# Altium PCB BreakOut_2017.PcbDoc
Units mm, origin at the board's own origin, x right, y up, seen from the top; angles counter-clockwise.
Board outline 34 x 35 mm, 4 copper layers (Component Side, Ground Plane, Power Plane, Solder Side), stack 0.844 mm thick; 34 components, 124 nets, 335 pads, 166 vias.
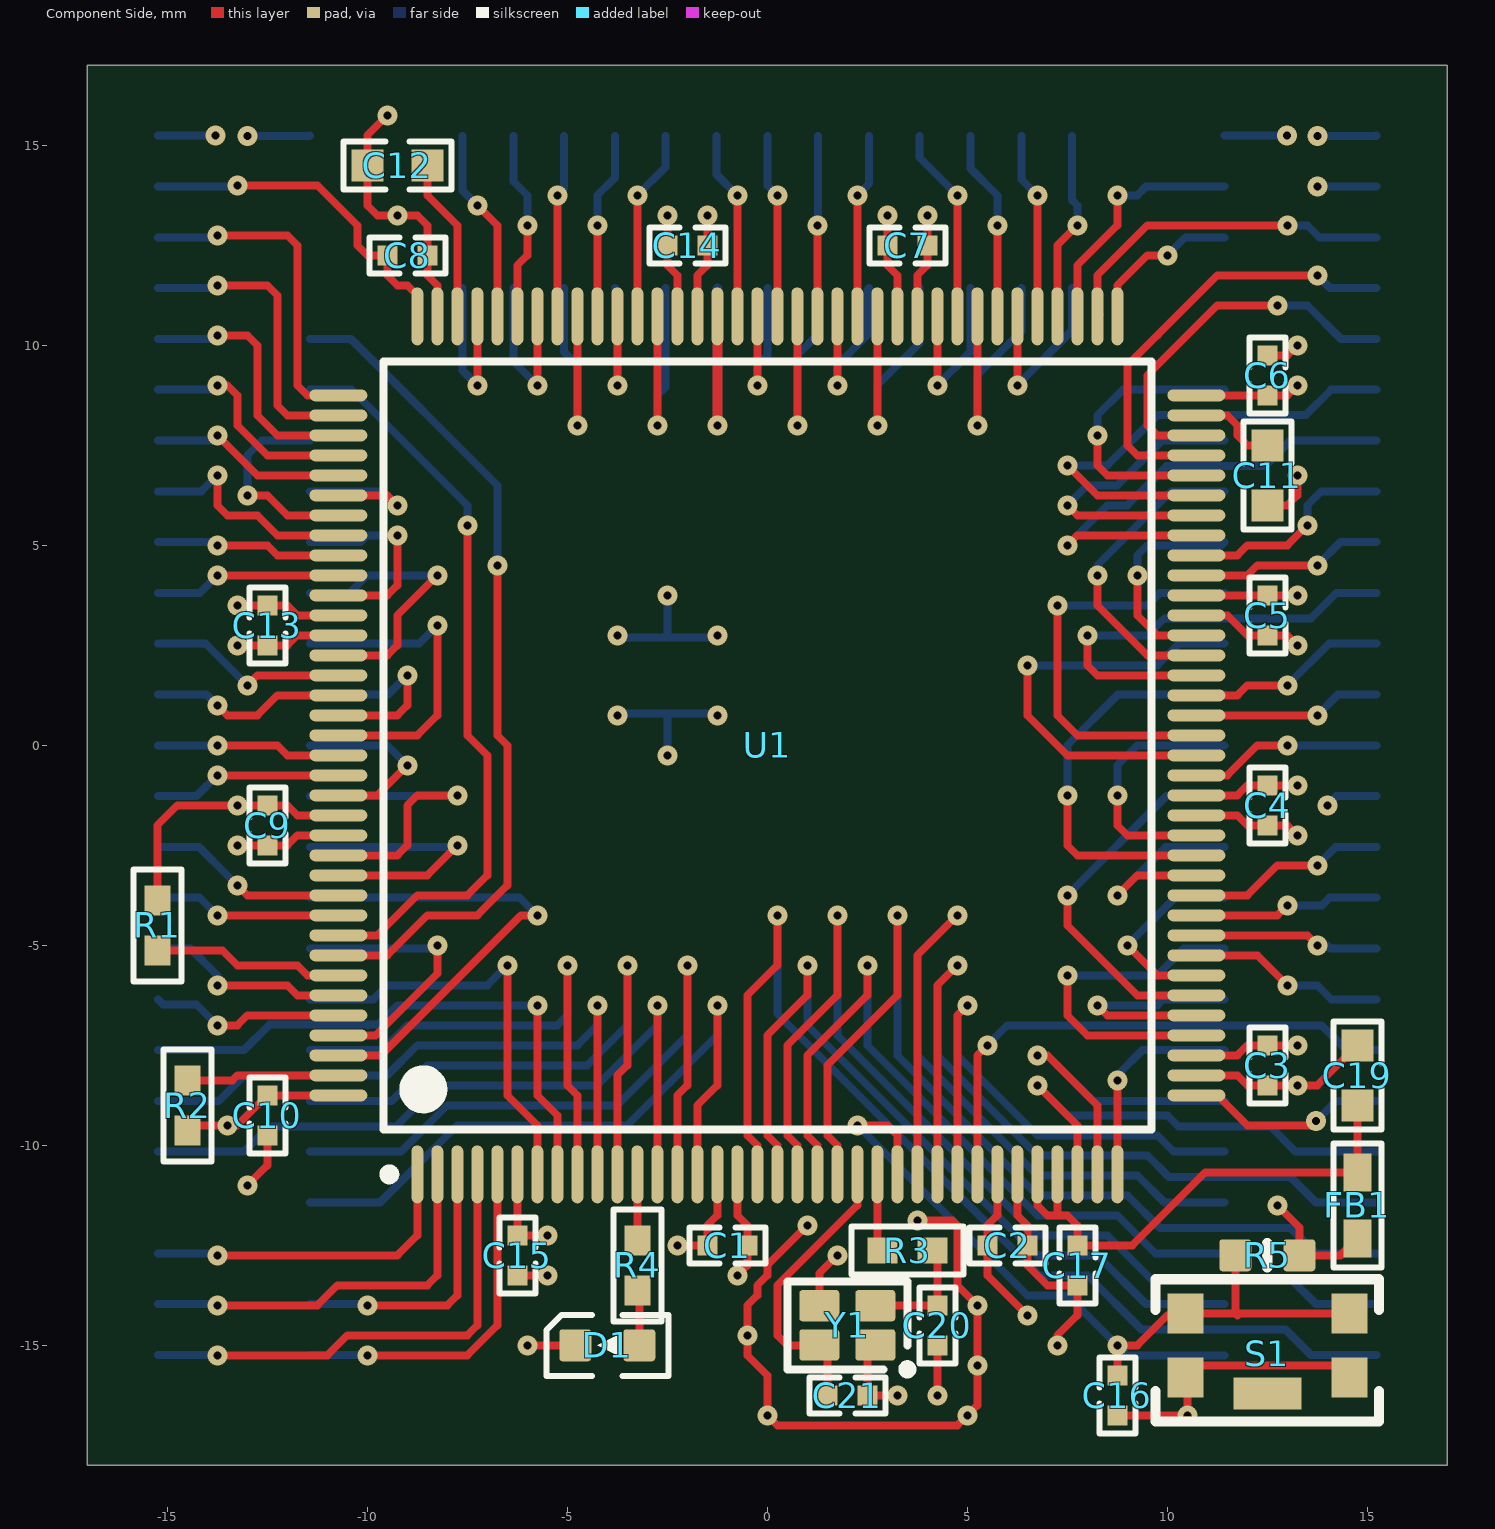
[diagram p0: Component Side view]
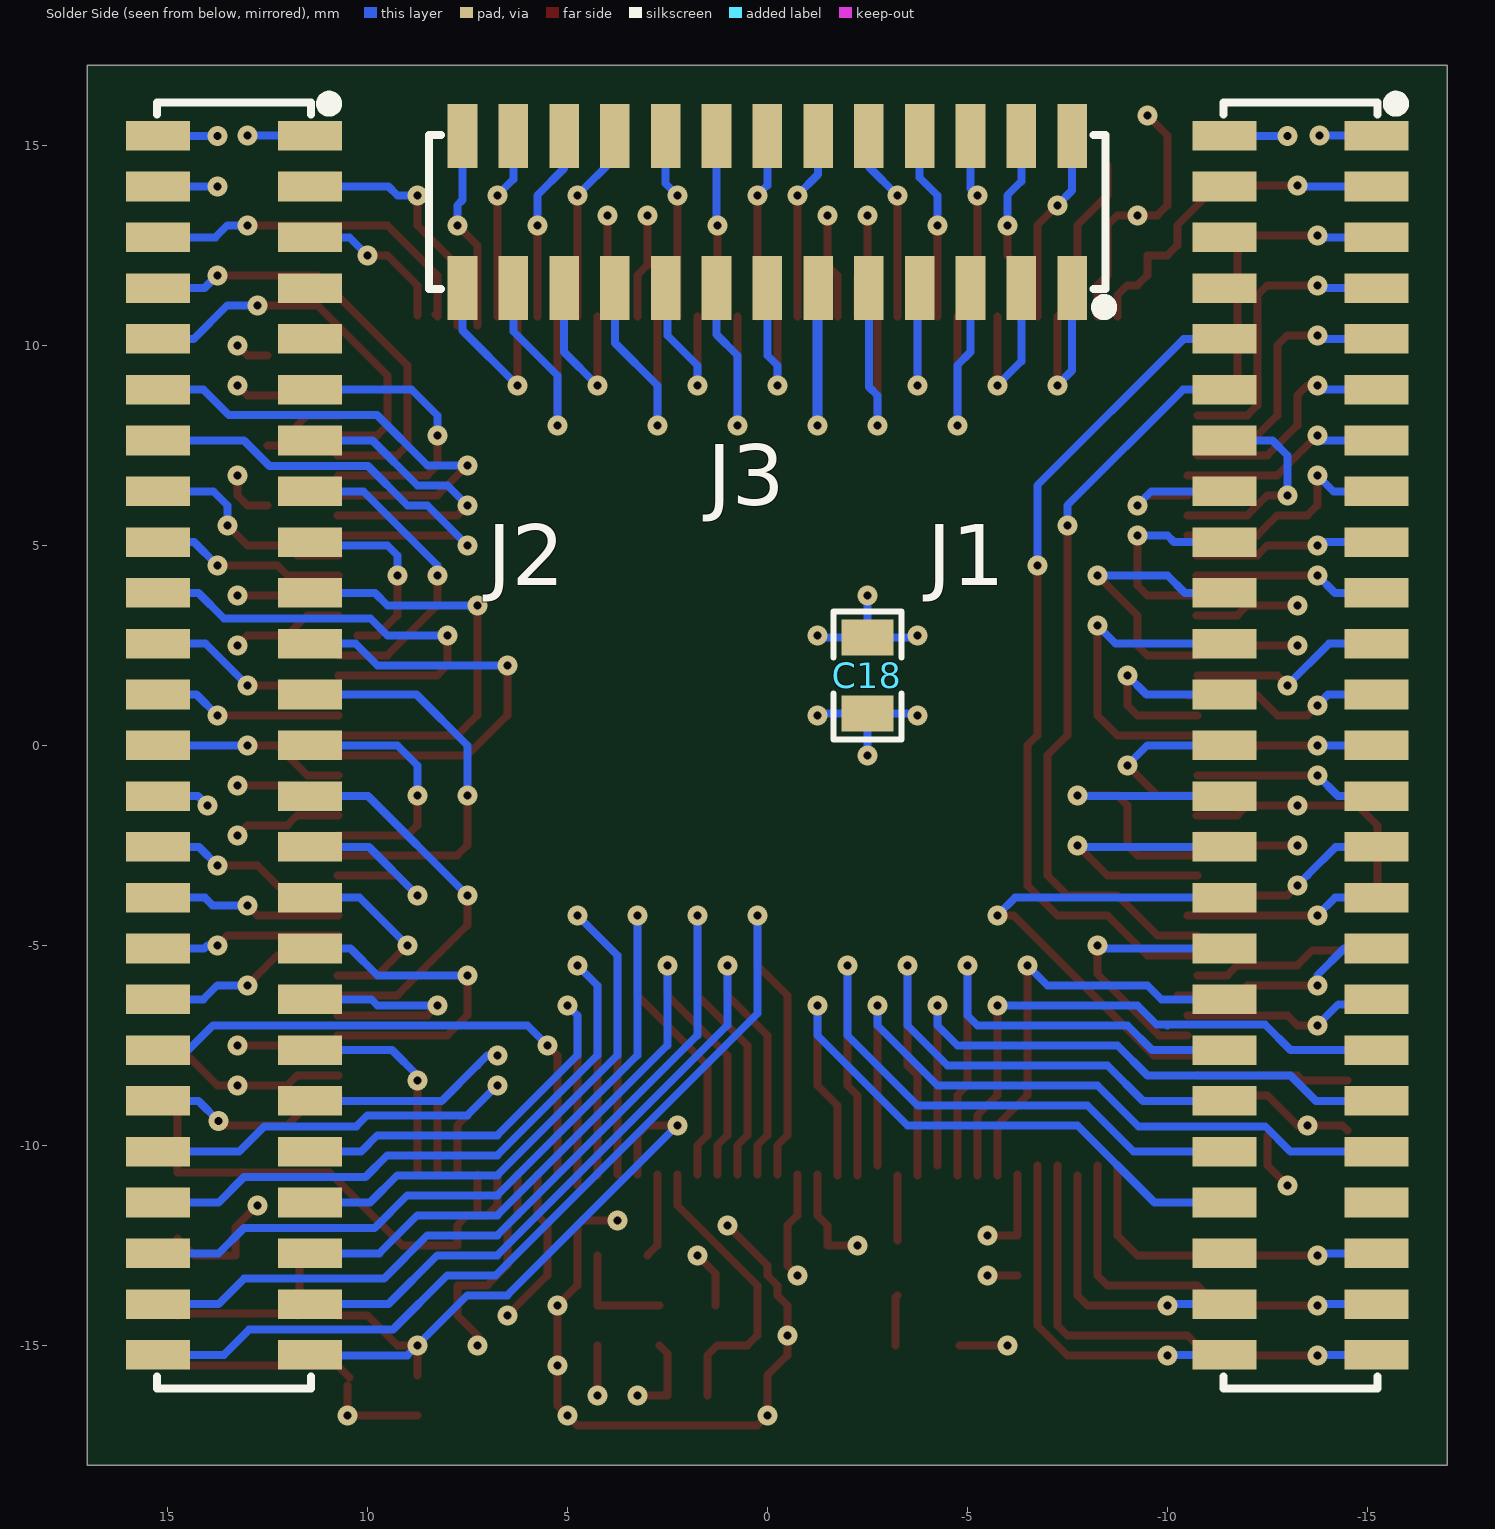
[diagram p1: Solder Side view, seen from below]
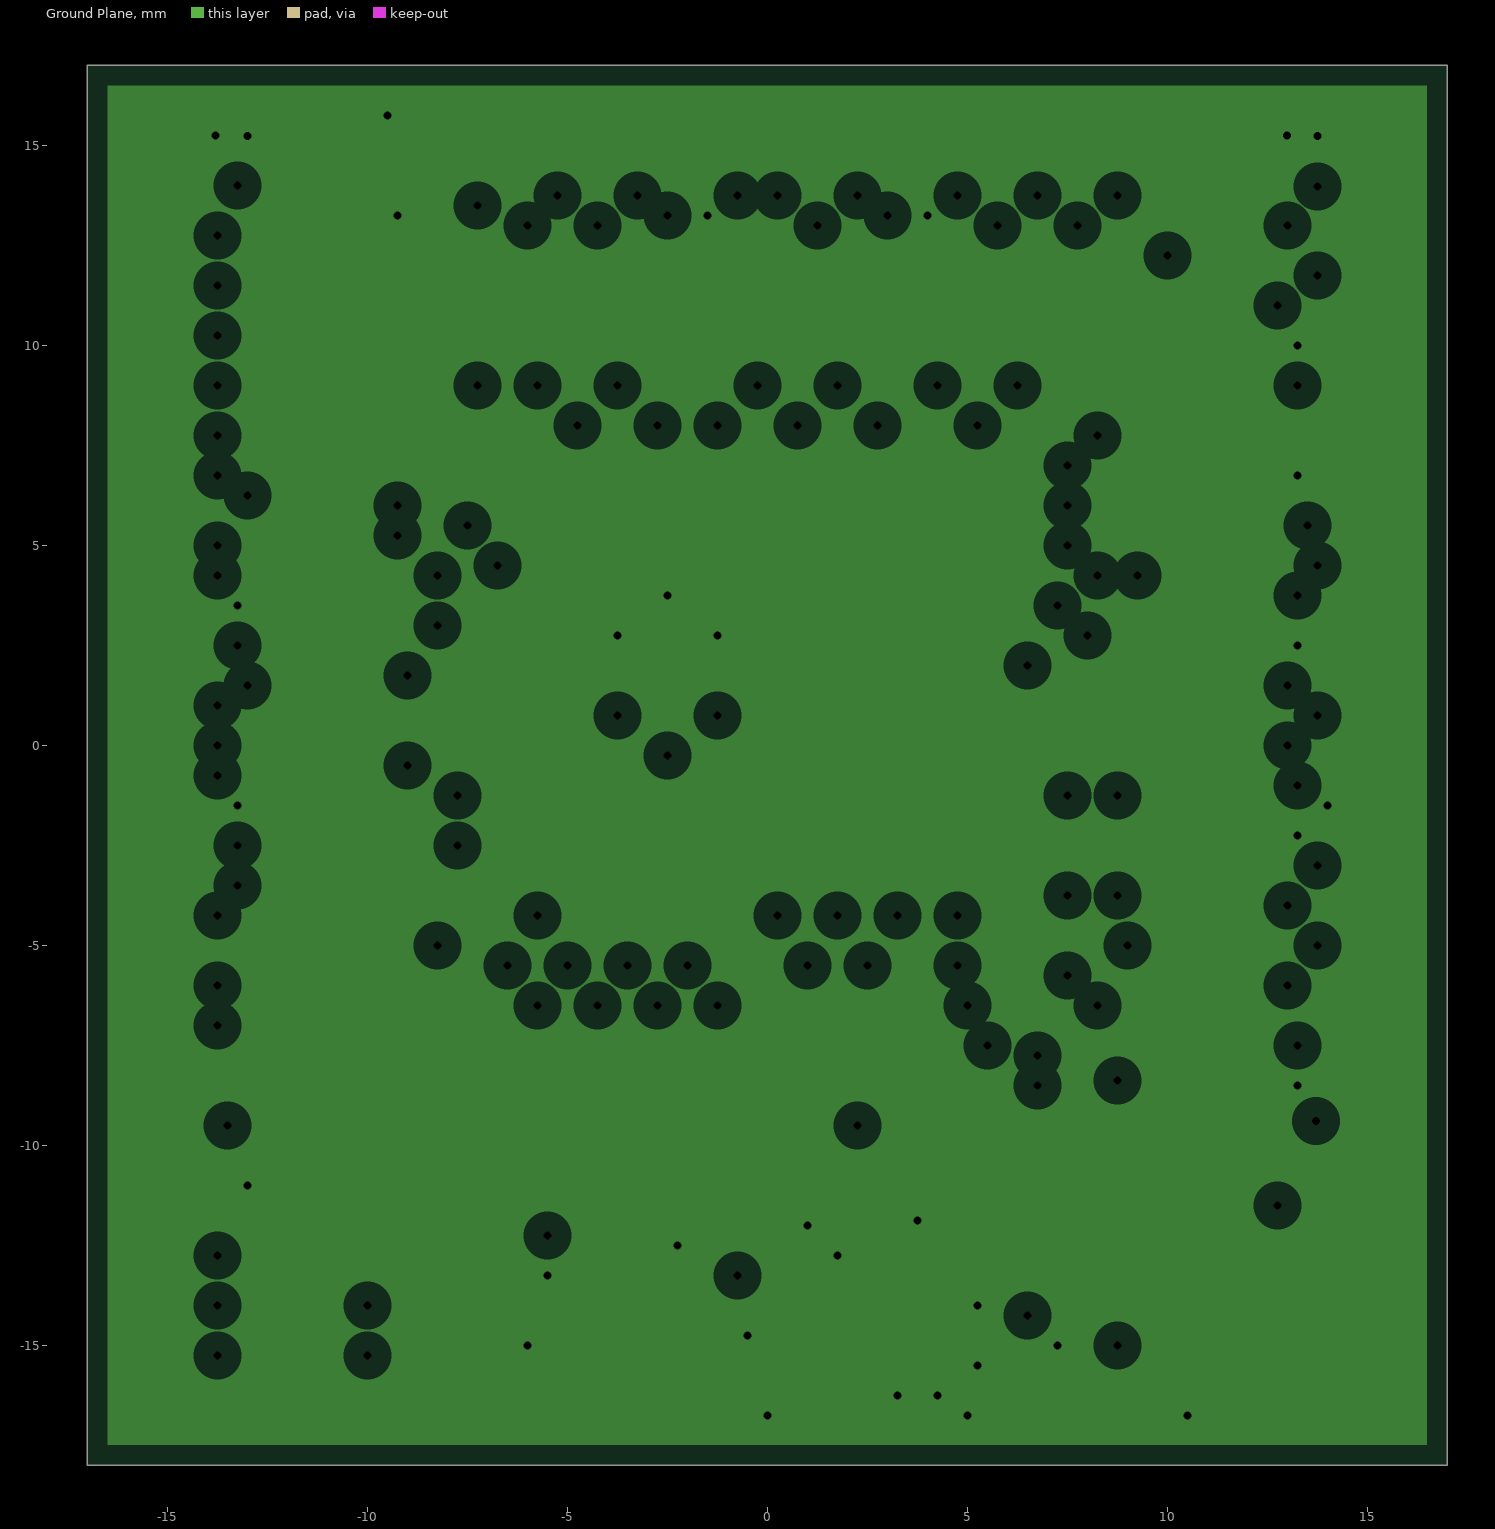
[diagram p2: Ground Plane, clearances drawn from the general rule]
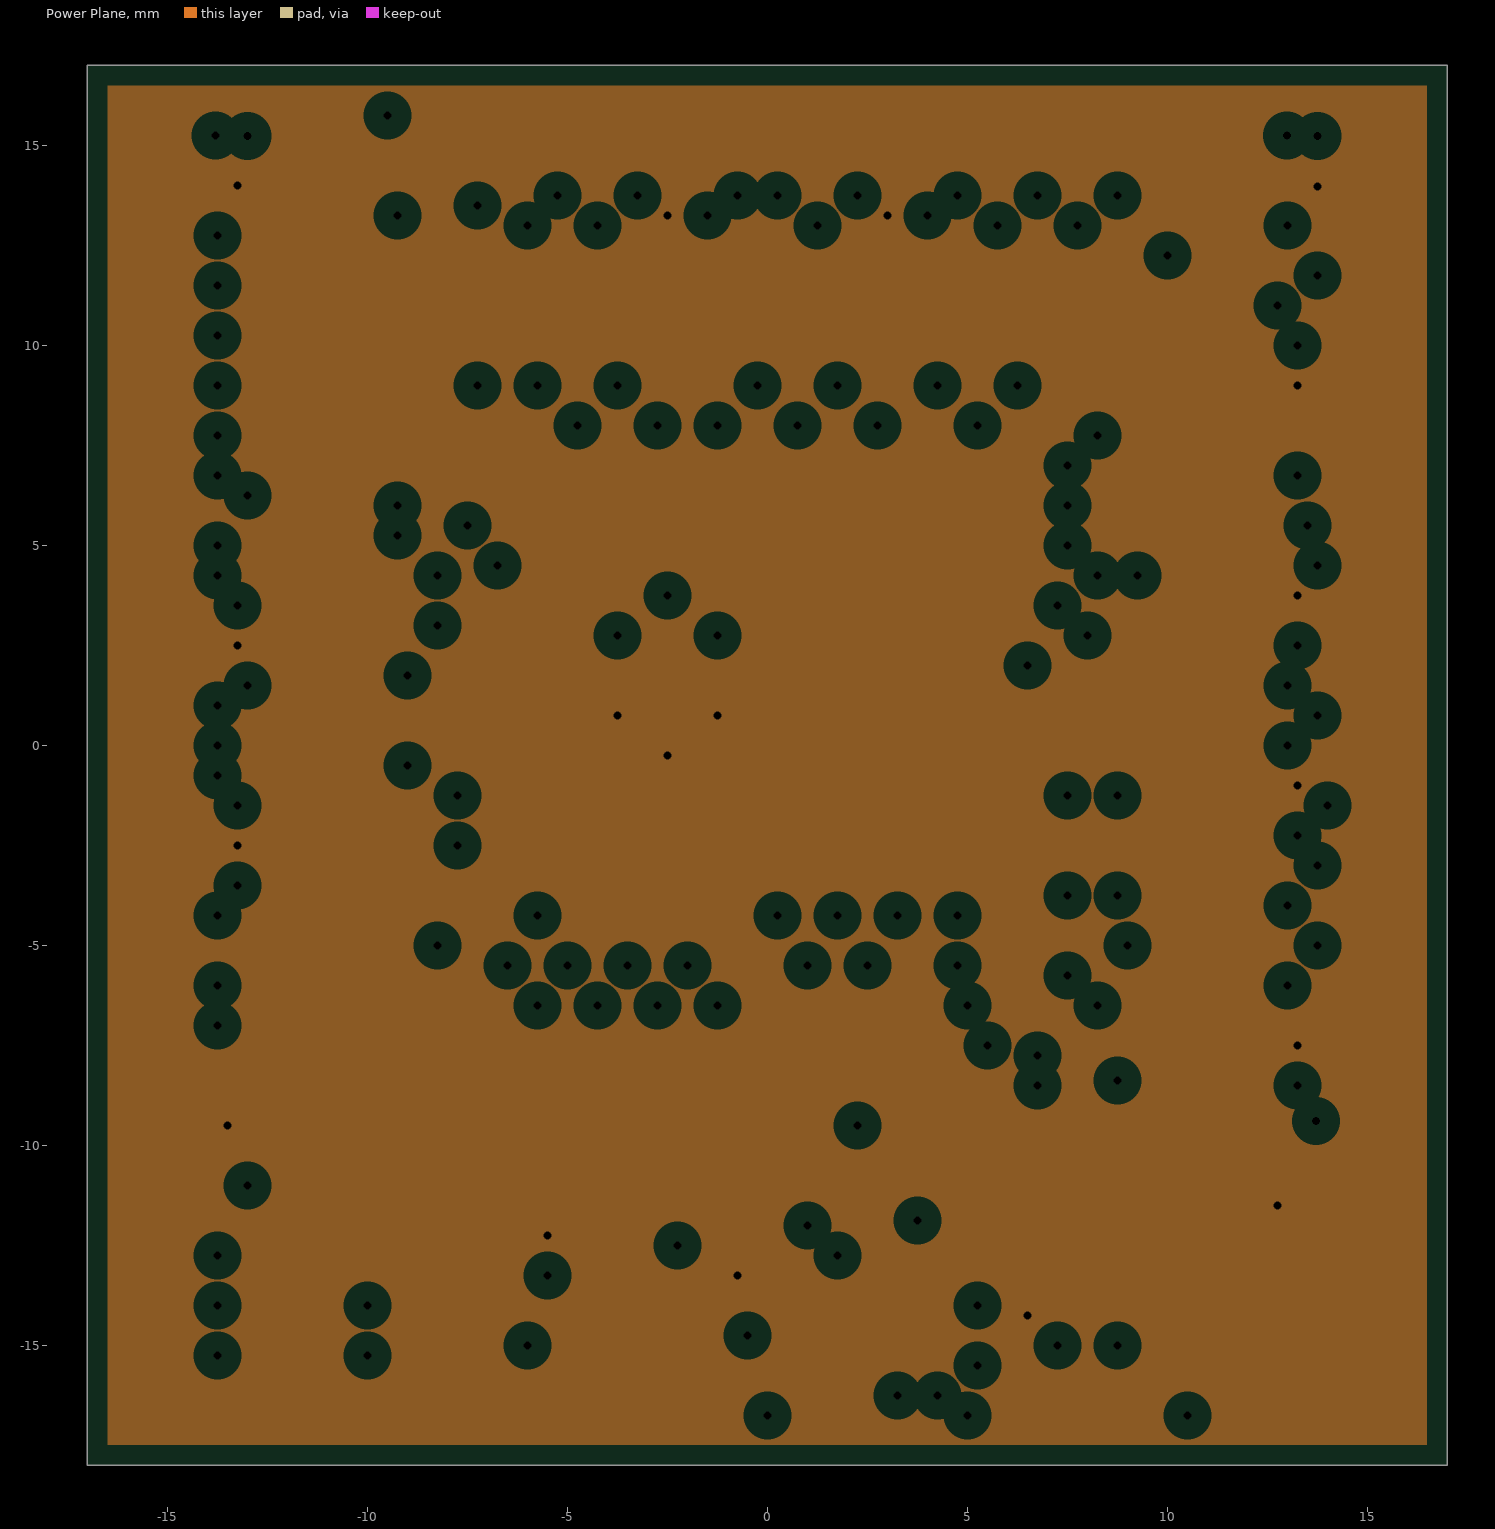
[diagram p3: Power Plane, clearances drawn from the general rule]
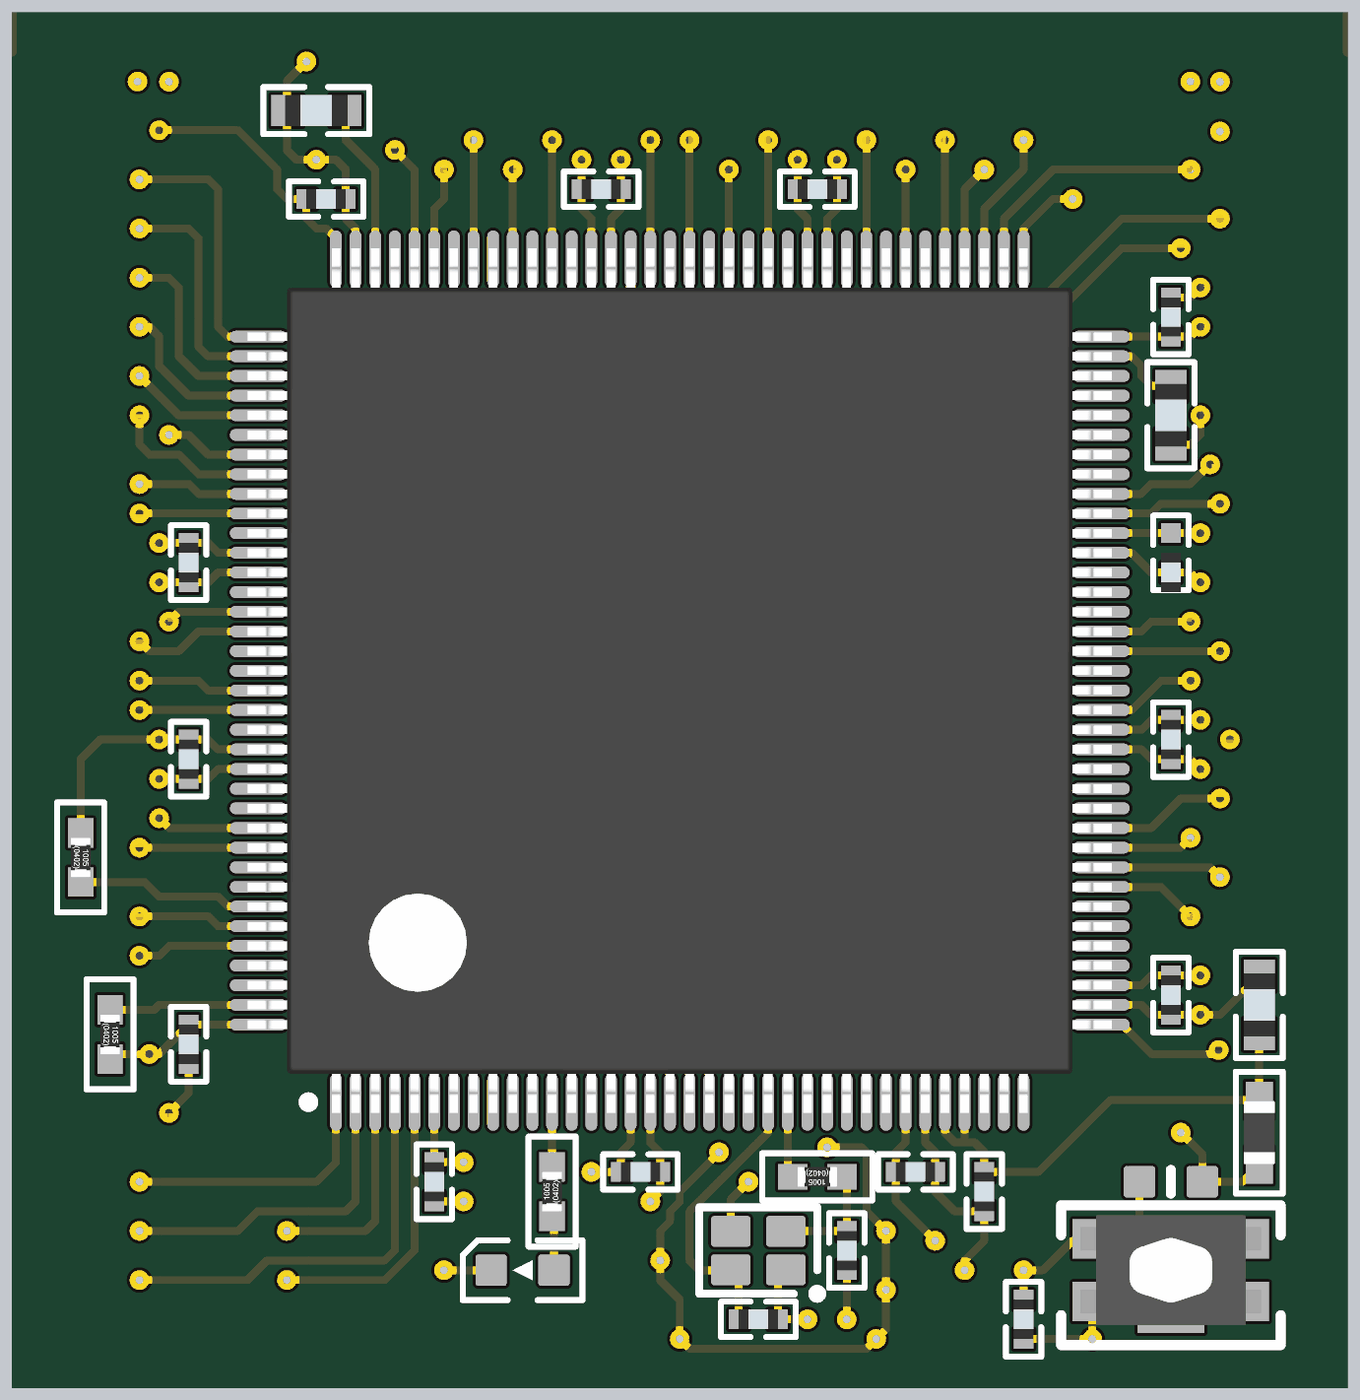
[diagram p4: 3D render of the assembled board from above, using the file's embedded part models]
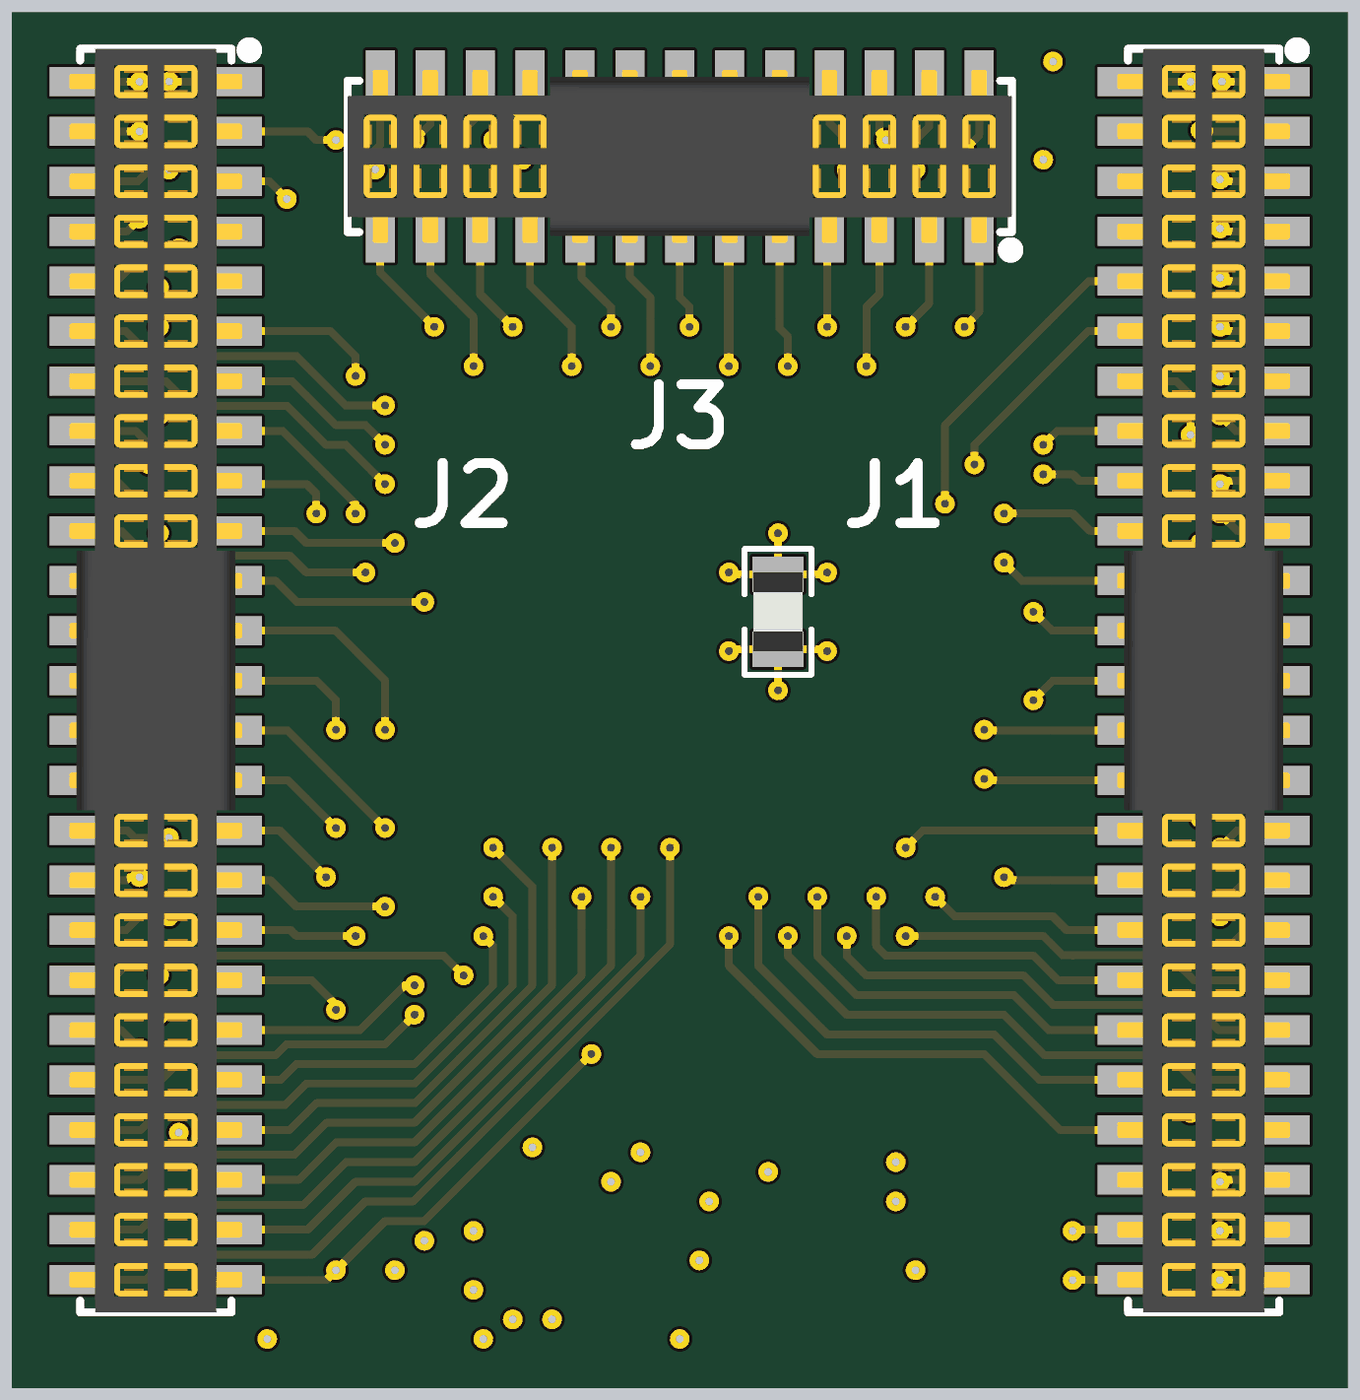
[diagram p5: 3D render of the assembled board from below, using the file's embedded part models]

## Layer stack, top to bottom
Top Solder: solder mask 0.0102, Solder Resist, Dk 3.5
Component Side: signal copper 0.0356
Dielectric 1: core 0.32, FR-4, Dk 4.8
Ground Plane: plane copper 0.036, net GND
Dielectric 3: prepreg 0.127, Dk 4.2
Power Plane: plane copper 0.036, net VDD
Dielectric 4: core 0.254, Dk 4.2
Solder Side: signal copper 0.0356
Bottom Solder: solder mask 0.0102, Solder Resist, Dk 3.5

## Board outline
-17,-18 17,-18 17,17 -17,17

## Design rules (kind name [scope] priority, off if disabled: settings)
AssemblyTestPointUsage [All] p1 off:
AssemblyTestpoint [All] p1 off: testpointundercomponent=TRUE minsize=1.016 maxsize=2.54 preferedsize=1.524 minholesize=0 maxholesize=1.016 preferedholesize=0.813 testpointgrid=0.025 usegrid=TRUE gridtolerance=0 allowsidetop=TRUE allowsidebottom=TRUE
BoardOutlineClearance [All] p1: gap=0.3
Clearance [All] p1: gap=0.125
ComponentClearance [All] p1: gap=0.2 collisioncheckmode=3 verticalgap=1 showdistances=FALSE
DiffPairsRouting [All] p1 off: maxlimit=0.254 minlimit=0.254 mostfreqgap=0.254 toplayer_minwidth=0.381 toplayer_maxwidth=0.381 toplayer_prefwidth=0.381 bottomlayer_minwidth=0.381 bottomlayer_maxwidth=0.381 bottomlayer_prefwidth=0.381 maxuncoupledlength=12.7
FabricationTestPointUsage TestPointUsage [All] p1 off: valid=0 allowmultiple=FALSE
FabricationTestpoint Testpoint [All] p1 off: side=3 testpointundercomponent=TRUE minsize=1.016 maxsize=2.54 preferedsize=1.524 minholesize=0 maxholesize=1.016 preferedholesize=0.813 testpointgrid=0.025 allowsidetop=TRUE allowsidebottom=TRUE usegrid=TRUE gridtolerance=0
FanoutControl Fanout_BGA [IsBGA] p1 off: bgadir=Out bgaviamode=Centered fanoutstyle=Auto fanoutdirection=Alternating viagrid=0.025 // Fanout_BGA (Default Rule)
FanoutControl Fanout_LCC [IsLCC] p2 off: bgadir=Out bgaviamode=Centered fanoutstyle=Auto fanoutdirection=Alternating viagrid=0.025 // Fanout_LCC (Default Rule)
FanoutControl Fanout_SOIC [IsSOIC] p3 off: bgadir=Out bgaviamode=Centered fanoutstyle=Auto fanoutdirection=Alternating viagrid=0.025 // Fanout_SOIC (Default Rule)
FanoutControl Fanout_Small [(CompPinCount < 5)] p4 off: bgadir=Out bgaviamode=Centered fanoutstyle=Auto fanoutdirection=OutThenIn viagrid=0.025 // Fanout_Small (Default Rule)
FanoutControl Fanout_Default [All] p5 off: bgadir=Out bgaviamode=Centered fanoutstyle=Auto fanoutdirection=Alternating viagrid=0.025 // Fanout_Default (Default Rule)
Height [All] p1: minheight=0 maxheight=13 prefheight=10
HoleSize [All] p1: absolutevalues=TRUE maxlimit=6 minlimit=0.15 maxpercent=80.000 minpercent=20.000
HoleToHoleClearance [All] p1: gap=0.4 allowstackedmicrovias=TRUE
MinimumAnnularRing [All] p1: minimumring=0.15
MinimumSolderMaskSliver [All] p1: minsoldermaskwidth=0.15
MinimumSolderMaskSliver SilkscreenOverComponentPads [All] p2 off: minsoldermaskwidth=0.254
NetAntennae [All] p1 off: netantennaetolerance=0
PlaneClearance [All] p1: clearance=0.5
PlaneConnect [All] p1: planeconnectstyle=Relief reliefexpansion=0.4 reliefentries=4 reliefconductorwidth=0.3 reliefairgap=0.2
PolygonConnect [All] p1: connectstyle=Relief reliefconductorwidth=0.25 reliefentries=4 polygonreliefangle="90 Angle" airgapwidth=0.254
RoutingCorners [All] p1: cornerstyle=45-Degree minsetback=1.5 maxsetback=2.54
RoutingVias [All] p1: holewidth=0.2 width=0.5 viastyle="Through Hole" minholewidth=0.2 minwidth=0.4 maxholewidth=0.2 maxwidth=0.6
SilkToSilkClearance [All] p1 off: silktosilkclearance=0.1
SolderMaskExpansion [All] p1: expansion=0.075
Width [All] p1: maxlimit=4 minlimit=0.125 preferedwidth=0.2
10 further rules are at their usual default settings.

## Components (designator, comment, footprint, x,y, rotation, side; value= is the part's Value field where it differs from the comment)
C1 "100nF" "WCAP-CSGP_0402, 1x0.5x0.5" -1,-12.5 r180 top locked
C2 "100nF" "WCAP-CSGP_0402, 1x0.5x0.5" 6,-12.5 r180 top locked
C3 "100nF" "WCAP-CSGP_0402, 1x0.5x0.5" 12.5,-8 r90 top locked
C4 "100nF" "WCAP-CSGP_0402, 1x0.5x0.5" 12.5,-1.5 r90 top locked
C5 "100nF" "WCAP-CSGP_0402, 1x0.5x0.5" 12.5,3.25 r90 top
C6 "100nF" "WCAP-CSGP_0402, 1x0.5x0.5" 12.5,9.25 r270 top locked
C7 "100nF" "WCAP-CSGP_0402, 1x0.5x0.5" 3.5,12.5 r180 top locked
C8 "100nF" "WCAP-CSGP_0402, 1x0.5x0.5" -9,12.25 r180 top
C9 "100nF" "WCAP-CSGP_0402, 1x0.5x0.5" -12.5,-2 r270 top locked
C10 "100nF" "WCAP-CSGP_0402, 1x0.5x0.5" -12.5,-9.25 r90 top locked
C11 "2.2uF" "WCAP-CSGP_0603, 1.6x0.8x0.8" 12.5,6.75 r270 top
C12 "2.2uF" "WCAP-CSGP_0603, 1.6x0.8x0.8" -9.25,14.5 r180 top
C13 "100nF" "WCAP-CSGP_0402, 1x0.5x0.5" -12.5,3 r270 top locked
C14 "100nF" "WCAP-CSGP_0402, 1x0.5x0.5" -2,12.5 r180 top locked
C15 "100nF" "WCAP-CSGP_0402, 1x0.5x0.5" -6.25,-12.75 r90 top locked
C16 "100nF" "WCAP-CSGP_0402, 1x0.5x0.5" 8.75,-16.25 r90 top
C17 "100nF" "WCAP-CSGP_0402, 1x0.5x0.5" 7.75,-13 r90 top
C18 "4.7uF" "WCAP-CSGP_0805, 2x1.25x1.25" -2.5,1.75 r270 bottom
C19 "1uF" "WCAP-CSGP_0603, 1.6x0.8x0.8" 14.75,-8.25 r270 top
C20 "47nF" "WCAP-CSGP_0402, 1x0.5x0.5" 4.25,-14.5 r90 top
C21 "4.7nF" "WCAP-CSGP_0402, 1x0.5x0.5" 2,-16.25 r180 top
D1 "Rouge" SMCW_0603 -4,-15 r0 top
FB1 "742792624" "WE-CBF_0603_High Current" 14.75,-11.5 r90 top
J1 "WE-1.27 mm Socket Header 623350235321" 623350235321 -13.335,0 r270 bottom locked
J2 "WE-1.27 mm Socket Header 623350235321" 623350235321 13.335,0 r270 bottom locked
J3 "WE-1.27 mm Socket Header 6623326235321" 623326235321 0,13.335 r0 bottom locked
R1 "RC0402FR-0710KL" RESC1005X04N -15.25,-4.5 r270 top
R2 "RC0402FR-0710KL" RESC1005X04N -14.5,-9 r270 top
R3 "RC0402FR-0710KL" RESC1005X04N 3.5,-12.625 r180 top
R4 "RC0402FR-07100RL" RESC1005X04N -3.25,-13 r90 top
R5 "10k" R_0603_std 12.5,-12.75 r180 top (schematic designator R3)
S1 "MCITPG" MCIPTG23K-V 12.5,-15 r180 top
U1 "STM32F767Z(G-I)Tx" TSQFP50P2200X2200X160-144N 0,0 r90 top locked
Y1 "LFXTAL071255" LFXTAL071255 2,-14.5 r0 top

## Footprints (in the part's own frame and the unit in brackets; to place one, negate y for a bottom-side part, rotate by r counter-clockwise, add the part's x,y. Pads: shape width x height; smd on the part's side, far side on the other; paste and mask are expansions set on the pad)
623326235321 [mm] "26 pins, dual row, straight, gold plating"
  rect 0.74x1.6 smd: 1(-7.62,1.9) 2(-6.35,1.9) 3(-5.08,1.9) 4(-3.81,1.9) 5(-2.54,1.9) 6(-1.27,1.9) 7(0,1.9) 8(1.27,1.9) 9(2.54,1.9) 10(3.81,1.9) 11(5.08,1.9) 12(6.35,1.9) 13(7.62,1.9) 14(-7.62,-1.9) 15(-6.35,-1.9) 16(-5.08,-1.9) 17(-3.81,-1.9) 18(-2.54,-1.9) 19(-1.27,-1.9) 20(0,-1.9) 21(1.27,-1.9) 22(2.54,-1.9) 23(3.81,-1.9) 24(5.08,-1.9) 25(6.35,-1.9) 26(7.62,-1.9)
  silkscreen extent -8.54,-1.92 8.45,2.5, body extent -8.45,-2.2 8.46,2.2, height 2.25
623350235321 [mm] "50 pins, dual row, straight, gold plating"
  rect 0.74x1.6 smd: 1(-15.24,1.9) 2(-13.97,1.9) 3(-12.7,1.9) 4(-11.43,1.9) 5(-10.16,1.9) 6(-8.89,1.9) 7(-7.62,1.9) 8(-6.35,1.9) 9(-5.08,1.9) 10(-3.81,1.9) 11(-2.54,1.9) 12(-1.27,1.9) 13(0,1.9) 14(1.27,1.9) 15(2.54,1.9) 16(3.81,1.9) 17(5.08,1.9) 18(6.35,1.9) 19(7.62,1.9) 20(8.89,1.9) 21(10.16,1.9) 22(11.43,1.9) 23(12.7,1.9) 24(13.97,1.9) 25(15.24,1.9) 26(-15.24,-1.9) 27(-13.97,-1.9) 28(-12.7,-1.9) 29(-11.43,-1.9) 30(-10.16,-1.9) 31(-8.89,-1.9) 32(-7.62,-1.9) 33(-6.35,-1.9) 34(-5.08,-1.9) 35(-3.81,-1.9) 36(-2.54,-1.9) 37(-1.27,-1.9) 38(0,-1.9) 39(1.27,-1.9) 40(2.54,-1.9) 41(3.81,-1.9) 42(5.08,-1.9) 43(6.35,-1.9) 44(7.62,-1.9) 45(8.89,-1.9) 46(10.16,-1.9) 47(11.43,-1.9) 48(12.7,-1.9) 49(13.97,-1.9) 50(15.24,-1.9)
  silkscreen extent -16.16,-1.92 16.07,2.5, body extent -16.07,-2.2 16.08,2.2, height 2.25
LFXTAL071255 [mm] "Chip L4-lead, 2mm x 1.6mm"
  rrect20% 1x0.78 smd: 1(0.7,0.49) 2(-0.7,0.49) 3(-0.7,-0.49) 4(0.7,-0.49)
  silkscreen extent -1.5,-1.2 1.6,1.1, body extent -1,-0.8 1,0.8, height 0.5
MCIPTG23K-V [mm]
  rect 0.9x1 smd: 1(-2.05,0.8) 2(-2.05,-0.8) 3(2.05,0.8) 4(2.05,-0.8)
  rect 1.7x0.8 smd: 5(0,1.2)
  silkscreen extent -2.79,-1.65 2.79,1.91, body extent -2.3,-1.4 2.3,1.4, height 1.9
R_0603_std [mm] "standard size package (reflow ok)"
  rrect20% 0.8x0.8 smd: 1(-0.8,0) 2(0.8,0)
  silkscreen extent 0,-0.3 0,0.3, body extent -0.8,-0.35 0.8,0.35, height 0.85
RESC1005X04N [mm] "Chip Resistor, 2-Leads, Body 1,1x0,5mm, IPC Medium Density"
  rect 0.75x0.65 smd: 1(-0.625,0) 2(0.625,0)
  silkscreen extent -1.4,-0.6 1.4,0.6, body extent -0.5,-0.25 0.5,0.25, height 0.35
SMCW_0603 [mm]
  rrect20% 0.8x0.8 smd: 1(-0.8,0) 2(0.8,0)
  silkscreen extent -1.52,-0.76 1.52,0.76, body extent -0.8,-0.4 0.8,0.4, height 0.8
TSQFP50P2200X2200X160-144N [mm] "TSQFP, 144-Leads, Body 20,00x20,00mm, Pitch 0,50mm, IPC Medium Density"
  oval 1.45x0.3 smd: 1(-10.725,8.75) 2(-10.725,8.25) 3(-10.725,7.75) 4(-10.725,7.25) 5(-10.725,6.75) 6(-10.725,6.25) 7(-10.725,5.75) 8(-10.725,5.25) 9(-10.725,4.75) 10(-10.725,4.25) 11(-10.725,3.75) 12(-10.725,3.25) 13(-10.725,2.75) 14(-10.725,2.25) 15(-10.725,1.75) 16(-10.725,1.25) 17(-10.725,0.75) 18(-10.725,0.25) 19(-10.725,-0.25) 20(-10.725,-0.75) 21(-10.725,-1.25) 22(-10.725,-1.75) 23(-10.725,-2.25) 24(-10.725,-2.75) 25(-10.725,-3.25) 26(-10.725,-3.75) 27(-10.725,-4.25) 28(-10.725,-4.75) 29(-10.725,-5.25) 30(-10.725,-5.75) 31(-10.725,-6.25) 32(-10.725,-6.75) 33(-10.725,-7.25) 34(-10.725,-7.75) 35(-10.725,-8.25) 36(-10.725,-8.75) 73(10.725,-8.75) 74(10.725,-8.25) 75(10.725,-7.75) 76(10.725,-7.25) 77(10.725,-6.75) 78(10.725,-6.25) 79(10.725,-5.75) 80(10.725,-5.25) 81(10.725,-4.75) 82(10.725,-4.25) 83(10.725,-3.75) 84(10.725,-3.25) 85(10.725,-2.75) 86(10.725,-2.25) 87(10.725,-1.75) 88(10.725,-1.25) 89(10.725,-0.75) 90(10.725,-0.25) 91(10.725,0.25) 92(10.725,0.75) 93(10.725,1.25) 94(10.725,1.75) 95(10.725,2.25) 96(10.725,2.75) 97(10.725,3.25) 98(10.725,3.75) 99(10.725,4.25) 100(10.725,4.75) 101(10.725,5.25) 102(10.725,5.75) 103(10.725,6.25) 104(10.725,6.75) 105(10.725,7.25) 106(10.725,7.75) 107(10.725,8.25) 108(10.725,8.75)
  oval 0.3x1.45 smd: 37(-8.75,-10.725) 38(-8.25,-10.725) 39(-7.75,-10.725) 40(-7.25,-10.725) 41(-6.75,-10.725) 42(-6.25,-10.725) 43(-5.75,-10.725) 44(-5.25,-10.725) 45(-4.75,-10.725) 46(-4.25,-10.725) 47(-3.75,-10.725) 48(-3.25,-10.725) 49(-2.75,-10.725) 50(-2.25,-10.725) 51(-1.75,-10.725) 52(-1.25,-10.725) 53(-0.75,-10.725) 54(-0.25,-10.725) 55(0.25,-10.725) 56(0.75,-10.725) 57(1.25,-10.725) 58(1.75,-10.725) 59(2.25,-10.725) 60(2.75,-10.725) 61(3.25,-10.725) 62(3.75,-10.725) 63(4.25,-10.725) 64(4.75,-10.725) 65(5.25,-10.725) 66(5.75,-10.725) 67(6.25,-10.725) 68(6.75,-10.725) 69(7.25,-10.725) 70(7.75,-10.725) 71(8.25,-10.725) 72(8.75,-10.725) 109(8.75,10.725) 110(8.25,10.725) 111(7.75,10.725) 112(7.25,10.725) 113(6.75,10.725) 114(6.25,10.725) 115(5.75,10.725) 116(5.25,10.725) 117(4.75,10.725) 118(4.25,10.725) 119(3.75,10.725) 120(3.25,10.725) 121(2.75,10.725) 122(2.25,10.725) 123(1.75,10.725) 124(1.25,10.725) 125(0.75,10.725) 126(0.25,10.725) 127(-0.25,10.725) 128(-0.75,10.725) 129(-1.25,10.725) 130(-1.75,10.725) 131(-2.25,10.725) 132(-2.75,10.725) 133(-3.25,10.725) 134(-3.75,10.725) 135(-4.25,10.725) 136(-4.75,10.725) 137(-5.25,10.725) 138(-5.75,10.725) 139(-6.25,10.725) 140(-6.75,10.725) 141(-7.25,10.725) 142(-7.75,10.725) 143(-8.25,10.725) 144(-8.75,10.725)
  silkscreen extent -10.85,-9.6 9.6,9.6, body extent -11,-11 11,11, height 1.6
"WCAP-CSGP_0402, 1x0.5x0.5" [mm] "WCAP-CSGP Ceramic Capacitors, size 0402, body 1x0.5x0.5"
  rect 0.5x0.5 smd: 1(-0.5,0) 2(0.5,0)
  silkscreen extent -0.95,-0.45 0.95,0.45, body extent -0.5,-0.25 0.5,0.25, height 0.5
"WCAP-CSGP_0603, 1.6x0.8x0.8" [mm] "WCAP-CSGP Ceramic Capacitors, size 0603, body 1.6x0.8x0.8"
  rect 0.8x0.8 smd: 1(-0.75,0) 2(0.75,0)
  silkscreen extent -1.35,-0.6 1.35,0.6, body extent -0.8,-0.4 0.8,0.4, height 0.8
"WCAP-CSGP_0805, 2x1.25x1.25" [mm] "WCAP-CSGP Ceramic Capacitors, size 0805, body 2x1.25x1.25"
  rect 0.9x1.3 smd: 1(-0.95,0) 2(0.95,0)
  silkscreen extent -1.6,-0.85 1.6,0.85, body extent -1,-0.62 1,0.63, height 1.22
"WE-CBF_0603_High Current" [mm] "SMD EMI Suppression Ferrite  Bead, body 1.6mmx0.8mm"
  rect 0.95x0.7 smd: 1(-0.825,0) 2(0.825,0)
  silkscreen extent -1.55,-0.6 1.55,0.6, body extent -0.8,-0.4 0.8,0.4, height 0.8

## Part data
C1 C2 C3 C4 C5 C6 C7 C8 C9 C10 C13 C14 C15 C16 C17: library part "WCAP-CSGP, 885012205037", "CAP CER 100nF 16V X7R 0402"
C11 C12: library part "WCAP-CSGP, 885012206027", "CAP CER 2.2uF 10V X7R 0603"
C18: library part "WCAP-CSGP, 885012207053", "CAP CER 4.7uF 16V X7R 0805"
C19: library part "WCAP-CSGP, 885012106017", "CAP CER 1UF 16V X5R 0603"
C20: library part "WCAP-CSGP, 885012205054", "CAP CER 47nF 25V X7R 0402"
C21: library part "WCAP-CSGP, 885012205065", "CAP CER 4.7nF 50V X7R 0402"
D1: library part "LED 0603 Rouge", "WL-SMCW SMD LED Rouge"
FB1: library part "WE-CBF, 742792624", "Ferrite Bead 180ohm 0603 max1.5A"
J1 J2: "WR-PHD 1.27 mm Dual SMT Socket Header H=2.10mm"
J3: library part "WE-1.27 mm Socket Header 623326235321", "WR-PHD 1.27 mm Dual SMT Socket Header H=2.10mm"
R1 R2 R3: "RES SMD 10K OHM 1% 1/16W 0402"
R4: "RES SMD 100 OHM 1% 1/16W 0402"
R5: library part R_10k_0603, "Resistance 10k 5% pkg 0603"
S1: library part MCIPTG23K-V, "Switch MCIPTG23K-V Multicomp"
U1: library part STM32F767ZIT6, "STM32F767ZIT6"
Y1: "Quartz 16MHz 10pF CMS 4P ~2x1.6mm"

## Via types
v1: diameter 0.5, hole 0.2, Component Side to Solder Side, 166 vias

## Nets (pads, with @x,y where several pads share a name; then routed paths per layer and width w, separated by ;. In a path a pad name is that pad's centre, name@x,y a point inside that pad or via, vN(x,y) a via of type N, cw(c..) or ccw(c..) an arc to the next point about the centre after c; other vN are vias at no path point)
ADC1_IN8: J2.41 U1.46 | length 4.7
  Component Side w0.2: U1.46 12.75,-4.25 v1(13,-4)
  Solder Side w0.2: v1(13,-4) 13.87,-4 14.06,-3.81 J2.41
ADC1_IN9: J2.40 U1.47 | length 5
  Component Side w0.2: U1.47 12,-3.75 12.75,-3 v1(13.75,-3)
  Solder Side w0.2: v1(13.75,-3) 14.21,-2.54 J2.40
ADC1_IN14: J2.43 U1.44 | length 5
  Component Side w0.2: U1.44 12.25,-5.25 v1(13,-6)
  Solder Side w0.2: v1(13,-6) 13.75,-6 14.1,-6.35 J2.43
ADC1_IN15: J2.42 U1.45 | length 4.6
  Component Side w0.2: U1.45 13.5,-4.75 v1(13.75,-5)
  Solder Side w0.2: v1(13.75,-5) 14,-5 14.08,-5.08 J2.42
ADC3_IN4: J2.50 U1.18 | length 27.9
  Component Side w0.2: U1.18 -0.25,-10 -0.5,-9.75 -0.5,-6.25 0.25,-5.5 v1(0.25,-4.25)
  Solder Side w0.2: v1(0.25,-4.25) 0.25,-6.71 6.79,-13.25 8,-13.25 9.355,-14.605 12.954,-14.605 13.589,-15.24 J2.50
ADC3_IN5: J2.24 U1.19 | length 20.6
  Component Side w0.2: U1.19 0.25,-10 0,-9.75 0,-7.25 1,-6.25 v1(1,-5.5)
  Solder Side w0.2: v1(1,-5.5) 1,-7 6.75,-12.75 8.25,-12.75 9.47,-13.97 J2.24
ADC3_IN6: J2.49 U1.20 | length 26.4
  Component Side w0.2: U1.20 0.75,-10 0.5,-9.75 0.5,-7.5 0.75,-7.25 1.75,-6.25 v1(1.75,-4.25)
  Solder Side w0.2: v1(1.75,-4.25) 1.75,-7.25 6.75,-12.25 8.5,-12.25 9.585,-13.335 13.081,-13.335 13.716,-13.97 J2.49
ADC3_IN7: J2.23 U1.21 | length 19
  Component Side w0.2: U1.21 1.25,-10 1,-9.75 1,-7.75 2.5,-6.25 v1(2.5,-5.5)
  Solder Side w0.2: v1(2.5,-5.5) 2.5,-7.5 6.75,-11.75 8.75,-11.75 9.7,-12.7 J2.23
ADC3_IN8: J2.48 U1.22 | length 24.8
  Component Side w0.2: U1.22 1.75,-10 1.5,-9.75 1.5,-8 3.25,-6.25 v1(3.25,-4.25)
  Solder Side w0.2: v1(3.25,-4.25) 3.25,-7.75 6.75,-11.25 9,-11.25 9.815,-12.065 13.081,-12.065 13.716,-12.7 J2.48
ADC3_IN9: J1.21 U1.13 | length 18.3
  Component Side w0.2: U1.13@-2.75,-10.5 v1(-2.75,-6.5)
  Solder Side w0.2: J1.21 -13.081,-10.16 -12.446,-9.525 -9.275,-9.525 -8.25,-8.5 -4.25,-8.5 -2.75,-7 v1(-2.75,-6.5)
ADC3_IN10: J2.22 U1.26 | length 20
  Component Side w0.2: U1.26 3.75,-5.25 v1(4.75,-4.25)
  Solder Side w0.2: v1(4.75,-4.25) 3.75,-5.25 3.75,-7.75 6.75,-10.75 9.25,-10.75 9.93,-11.43 J2.22
ADC3_IN11: J2.47 U1.27 | length 20.4
  Component Side w0.2: U1.27@4.25,-10.75 U1.27 4.25,-6 v1(4.75,-5.5)
  Solder Side w0.2: v1(4.75,-5.5) 4.25,-6 4.25,-7.75 6.75,-10.25 9.5,-10.25 10.045,-10.795 13.081,-10.795 13.716,-11.43 J2.47
ADC3_IN12: J2.21 U1.28 | length 13.6
  Component Side w0.2: U1.28@4.75,-11 U1.28 4.75,-6.75 v1(5,-6.5)
  Solder Side w0.2: v1(5,-6.5) 4.75,-6.75 4.75,-7.75 6.75,-9.75 9.75,-9.75 10.16,-10.16 J2.21
ADC3_IN13: J2.44 U1.29 | length 13.5
  Component Side w0.2: U1.29 5.25,-7.75 v1(5.5,-7.5)
  Solder Side w0.2: v1(5.5,-7.5) 6,-7 13.858,-7 14.478,-7.62 J2.44
ADC3_IN14: J1.46 U1.14 | length 17.7
  Component Side w0.2: U1.14@-2.25,-10.75 U1.14 -2.25,-8.75 -2,-8.5 v1(-2,-5.5)
  Solder Side w0.2: J1.46 -9.16,-10.16 -8,-9 -3.75,-9 -2,-7.25 v1(-2,-5.5)
ADC3_IN15: J1.47 U1.15 | length 17.1
  Component Side w0.2: U1.15@-1.75,-10.75 U1.15 -1.75,-9 -1.25,-8.5 v1(-1.25,-6.5)
  Solder Side w0.2: J1.47 -9.68,-11.43 -7.75,-9.5 -3.5,-9.5 -1.25,-7.25 v1(-1.25,-6.5)
BOOT0: R1.2 U1.138 | length 4.8
  Component Side w0.2: R1.2 -13.625,-5.125 -13.25,-5.5 -11.75,-5.5 -11.5,-5.75 U1.138@-10.75,-5.75
CAN1_RX: J1.33 U1.114 | length 3.7
  Component Side w0.2: U1.114@-10.5,6.25 -9.5,6.25 v1(-9.25,6)
  Solder Side w0.2: J1.33 -9.6,6.35 v1(-9.25,6)
CAN1_TX: J1.32 U1.115 | length 5.4
  Component Side w0.2: v1(-13,6.25) -12.5,6.25 -12,5.75 U1.115@-10.5,5.75
  Solder Side w0.2: v1(-13,6.25) -13,7.25 -12.63,7.62 J1.32
CAN2_RX: J2.3 U1.73 | length 3.9
  Component Side w0.2: U1.73@8.75,10.75 8.75,11.5 9.5,12.25 v1(10,12.25)
  Solder Side w0.2: v1(10,12.25) 10.45,12.7 J2.3
CAN2_TX: J1.31 U1.136 | length 19
  Component Side w0.2: U1.136@-10.75,-4.75 U1.136 -9.75,-4.75 -8.75,-3.75 -7.5,-3.75 -7,-3.25 -7,-0.25 -7.5,0.25 v1(-7.5,5.5)
  Solder Side w0.2: J1.31 -10.39,8.89 -7.5,6 v1(-7.5,5.5)
DAC_OUT1: J2.17 U1.40 | length 8.7
  Component Side w0.2: v1(7.5,-5.75) 7.5,-6.75 8,-7.25 U1.40 U1.40@10.75,-7.25
  Solder Side w0.2: v1(7.5,-5.75) 9.75,-5.75 10.42,-5.08 J2.17
DAC_OUT2: J2.18 U1.41 | length 5.9
  Component Side w0.2: v1(8.25,-6.5) 8.5,-6.75 U1.41 U1.41@10.75,-6.75
  Solder Side w0.2: v1(8.25,-6.5) 9.75,-6.5 9.9,-6.35 J2.18
GND: C1.2 C2.1 C3.1 C4.1 C5.1 C6.1 C7.1 C8.1 C9.1 C10.1 C11.2 C12.2 C13.1 C14.1 C15.1 C16.1 C17.1 C18.1 C19.1 C20.1 C21.1 D1.1 J1.1 J1.26 J2.1 J2.26 J2.39 R1.1 S1.1 S1.3 U1.16 U1.31 U1.38 U1.51 U1.61 U1.83 U1.94 U1.107 U1.120 U1.130 Y1.2 Y1.4 | length 84.4
  Component Side w0.2: R1.1 -15.25,-2 -14.75,-1.5 v1(-13.25,-1.5) C9.1 -12,-1.5 -11.75,-1.75 U1.130 ; v1(-13.25,3.5) C13.1 -12,3.5 -11.75,3.25 U1.120 ; v1(-13,-11) -12.5,-10.5 C10.1 ; v1(-9.5,15.75) -10,15.25 -10,13.5 -9.75,13.25 v1(-9.25,13.25) -8.75,13.25 -8.5,13 C8.1 -8.5,11.75 -8.25,11.5 U1.107 ; C15.1 v1(-5.5,-13.25) ; v1(-6,-15) D1.1 ; v1(-2.25,-12.5) C1.2 -1.5,-12 -1.25,-11.75 U1.16 ; U1.94 -1.75,11.75 -1.5,12 C14.1 v1(-1.5,13.25) ; v1(1,-12) 0,-13 0,-13.25 -0.25,-13.5 -0.25,-13.75 -0.5,-14 v1(-0.5,-14.75) -0.5,-15.25 0,-15.75 v1(0,-16.75) 0.25,-17 4.75,-17 v1(5,-16.75) 5.25,-16.5 v1(5.25,-15.5) v1(5.25,-14) 4.75,-13.5 4.75,-12 4.625,-11.875 v1(3.75,-11.875) ; Y1.2 1.3,-13.2 v1(1.75,-12.75) ; Y1.4@2.7,-15 2.5,-15.2 C21.1 v1(3.25,-16.25) ; U1.83 3.75,11.75 4,12 C7.1 v1(4,13.25) ; v1(4.25,-16.25) C20.1 ; U1.31 6.25,-11.75 6.5,-12 C2.1 6.5,-13 7,-13.5 C17.1 7.75,-14.25 7.25,-14.75 v1(7.25,-15) ; C16.1 v1(10.5,-16.75) S1.3@10.5,-16 ; S1.3 10.75,-15.5 S1.1@14.5,-15.5 ; U1.38 11.75,-8.25 12,-8.5 C3.1 v1(13.25,-8.5) 13.75,-8.5 C19.1 ; U1.51 11.75,-1.75 12,-2 C4.1 13,-2 v1(13.25,-2.25) ; U1.61 11.5,3.25 12,2.75 C5.1 13,2.75 v1(13.25,2.5) ; C11.2 13,6 13.25,6.25 v1(13.25,6.75) ; C6.1 13,9.75 v1(13.25,10)
  Solder Side w0.2: J1.1 v1(-13.8,15.24) ; v1(-13,15.235) -11.44,15.235 J1.26 ; v1(-3.75,2.75) -3.7,2.7 C18.1 ; v1(-2.5,3.75) C18.1 ; v1(-1.25,2.75) -1.3,2.7 C18.1 ; J2.1 v1(12.995,15.24) ; v1(13.75,15.235) 15.23,15.235 J2.26 ; v1(14,-1.5) 14.23,-1.27 J2.39
GPIO_PA8: J3.3 U1.100 | length 6.3
  Component Side w0.2: v1(-4.75,8) U1.100
  Solder Side w0.2: J3.3 -5.08,9.83 -4.75,9.5 v1(-4.75,8)
GPIO_PB2: J2.15 U1.48 | length 5.4
  Component Side w0.2: v1(8.75,-3.75) 9.25,-3.25 U1.48 U1.48@10.75,-3.25
  Solder Side w0.2: v1(8.75,-3.75) 9.96,-2.54 J2.15
GPIO_PB4: J1.15 U1.134 | length 5
  Component Side w0.2: v1(-13.25,-3.5) -13,-3.75 U1.134@-10.75,-3.75
  Solder Side w0.2: J1.15 -14.21,-2.54 -13.5,-3.25 v1(-13.25,-3.5)
GPIO_PC13: J1.43 U1.7 | length 10.8
  Component Side w0.2: v1(-6.5,-5.5) -6.5,-8.75 -5.75,-9.5 U1.7 U1.7@-5.75,-10.75
  Solder Side w0.2: J1.43 -9.85,-6.35 -9.5,-6 -7,-6 v1(-6.5,-5.5)
GPIO_PC14: J1.19 U1.8 | length 14.5
  Component Side w0.2: v1(-5.75,-6.5) -5.75,-8.75 -5.25,-9.25 U1.8 U1.8@-5.25,-10.75
  Solder Side w0.2: J1.19 -13.081,-7.62 -12.446,-6.985 -10.015,-6.985 ; -10,-7 -10.015,-6.985 ; -9.985,-6.985 -10.015,-6.985 ; v1(-5.75,-6.5) -9.25,-6.5 -9.735,-6.985 -10.015,-6.985
GPIO_PC15: J1.44 U1.9 | length 13.4
  Component Side w0.2: v1(-5,-5.5) -5,-8.5 -4.75,-8.75 U1.9 U1.9@-4.75,-10.75
  Solder Side w0.2: J1.44 -9.62,-7.62 -9,-7 -5.25,-7 -5,-6.75 v1(-5,-5.5)
GPIO_PD3: J1.9 U1.117 | length 4.6
  Component Side w0.2: v1(-13.75,5) -12.5,5 -12.25,4.75 U1.117
  Solder Side w0.2: J1.9 -13.83,5.08 v1(-13.75,5)
GPIO_PD4: J1.10 U1.118 | length 4.7
  Component Side w0.2: v1(-13.75,4.25) U1.118
  Solder Side w0.2: J1.10 -14.19,3.81 v1(-13.75,4.25)
GPIO_PD5: J1.34 U1.119 | length 5.1
  Component Side w0.2: U1.119@-10.75,3.75 U1.119 -9.5,3.75 -9.25,4 v1(-9.25,5.25)
  Solder Side w0.2: J1.34 -10.17,5.08 -10,5.25 v1(-9.25,5.25)
GPIO_PD10: J3.24 U1.79 | length 4.8
  Component Side w0.2: U1.79 v1(5.75,13)
  Solder Side w0.2: J3.24 5.08,14.42 5.75,13.75 v1(5.75,13)
GPIO_PD11: J3.12 U1.80 | length 6.6
  Component Side w0.2: v1(5.25,8) U1.80
  Solder Side w0.2: v1(5.25,8) 5.25,9.25 6.35,10.35 J3.12
GPIO_PE0: J1.42 U1.141 | length 6.8
  Component Side w0.2: U1.141@-10.5,-7.25 -9.79,-7.25 -8.25,-5.71 v1(-8.25,-5)
  Solder Side w0.2: J1.42 -8.33,-5.08 v1(-8.25,-5)
GPIO_PE1: J1.41 U1.142 | length 12.6
  Component Side w0.2: U1.142@-11,-7.75 U1.142 -9.655,-7.75 -6.155,-4.25 v1(-5.75,-4.25)
  Solder Side w0.2: J1.41 -6.19,-3.81 v1(-5.75,-4.25)
GPIO_PE3: J1.24 U1.2 | length 10.1
  Component Side w0.2: v1(-13.75,-14) -11.25,-14 -10.75,-13.5 -8.5,-13.5 -8.25,-13.25 U1.2@-8.25,-10.5
  Solder Side w0.2: J1.24 -13.78,-13.97 v1(-13.75,-14)
GPIO_PE7: J2.35 U1.58 | length 11.3
  Component Side w0.2: v1(8,2.75) 8,2 8.25,1.75 U1.58
  Solder Side w0.2: v1(8,2.75) 9.5,2.75 9.925,3.175 13.589,3.175 14.224,3.81 J2.35
GPIO_PE8: J2.8 U1.59 | length 7.9
  Component Side w0.2: v1(8.25,4.25) 8.25,3.5 9.5,2.25 U1.59
  Solder Side w0.2: v1(8.25,4.25) 8.25,4.5 10.1,6.35 J2.8
GPIO_PE15: J2.6 U1.68 | length 7.3
  Component Side w0.2: v1(8.25,7.75) 8.25,7 8.5,6.75 9.25,6.75 U1.68
  Solder Side w0.2: v1(8.25,7.75) 8.25,8.25 8.89,8.89 J2.6
GPIO_PF2: R4.2 U1.12 | length 1.6
  Component Side w0.2: R4.2 U1.12@-3.25,-10.75
GPIO_PF11: J2.12 U1.49 | length 10.6
  Component Side w0.2: v1(7.5,-1.25) 7.5,-2.5 7.75,-2.75 U1.49 U1.49@11,-2.75
  Solder Side w0.2: v1(7.5,-1.25) 7.5,0 8.77,1.27 J2.12
GPIO_PF12: J2.13 U1.50 | length 6.5
  Component Side w0.2: v1(8.75,-1.25) 8.75,-2 9,-2.25 U1.50 U1.50@10.75,-2.25
  Solder Side w0.2: v1(8.75,-1.25) 8.75,-0.5 9.25,0 J2.13
GPIO_PF13: J2.38 U1.53 | length 4.8
  Component Side w0.2: U1.53 11.5,-0.75 12.25,0 v1(13,0)
  Solder Side w0.2: v1(13,0) J2.38
GPIO_PG0: J2.37 U1.56 | length 4.7
  Component Side w0.2: U1.56 v1(13.75,0.75)
  Solder Side w0.2: v1(13.75,0.75) 14.27,1.27 J2.37
GPIO_PG1: J2.36 U1.57 | length 5
  Component Side w0.2: U1.57 11.75,1.25 12,1.5 v1(13,1.5)
  Solder Side w0.2: v1(13,1.5) 14.04,2.54 J2.36
GPIO_PG2: J3.9 U1.87 | length 4.5
  Component Side w0.2: v1(1.75,9) U1.87
  Solder Side w0.2: v1(1.75,9) 1.75,9.5 2.5,10.25 2.5,11.395 J3.9
GPIO_PG3: J3.21 U1.88 | length 4.5
  Component Side w0.2: U1.88 v1(1.25,13)
  Solder Side w0.2: v1(1.25,13) 1.27,13.02 J3.21
GPIO_PG4: J3.8 U1.89 | length 6.4
  Component Side w0.2: v1(0.75,8) U1.89
  Solder Side w0.2: v1(0.75,8) 0.75,9.75 1.27,10.27 J3.8
GPIO_PG5: J3.20 U1.90 | length 4.6
  Component Side w0.2: U1.90 v1(0.25,13.75)
  Solder Side w0.2: J3.20 0,14 v1(0.25,13.75)
GPIO_PG6: J3.7 U1.91 | length 4.3
  Component Side w0.2: v1(-0.25,9) U1.91
  Solder Side w0.2: v1(-0.25,9) -0.25,9.5 0,9.75 J3.7
GPIO_PG7: J3.19 U1.92 | length 4.7
  Component Side w0.2: U1.92 v1(-0.75,13.75)
  Solder Side w0.2: J3.19 -1.27,14.27 v1(-0.75,13.75)
GPIO_PG15: J1.39 U1.132 | length 7.9
  Component Side w0.2: U1.132@-10.75,-2.75 U1.132 -9.25,-2.75 -9,-2.5 -9,-1.5 -8.75,-1.25 v1(-7.75,-1.25)
  Solder Side w0.2: J1.39 v1@-7.75,-1.27
I2C1_SCL: J1.17 U1.139 | length 5.6
  Component Side w0.2: v1(-13.75,-6) -12,-6 -11.75,-6.25 U1.139 U1.139@-10.25,-6.25
  Solder Side w0.2: J1.17 -14.42,-5.08 -13.75,-5.75 v1(-13.75,-6)
I2C1_SDA: J1.18 U1.140 | length 5.1
  Component Side w0.2: v1(-13.75,-7) -13.25,-7 -13,-6.75 U1.140 U1.140@-10.5,-6.75
  Solder Side w0.2: J1.18 -15.11,-6.475 -14.275,-6.475 v1(-13.75,-7)
I2C2_SCL: J1.45 U1.11 | length 15.6
  Component Side w0.2: U1.11@-3.75,-10.75 U1.11 -3.75,-8.25 -3.5,-8 v1(-3.5,-5.5)
  Solder Side w0.2: J1.45 -9.39,-8.89 -8.5,-8 -4.5,-8 -3.5,-7 v1(-3.5,-5.5)
I2C2_SDA: J1.20 U1.10 | length 16.3
  Component Side w0.2: U1.10@-4.25,-10.5 v1(-4.25,-6.5)
  Solder Side w0.2: J1.20 -13.716,-8.89 -13.081,-8.255 -9.505,-8.255 -8.75,-7.5 -4.75,-7.5 -4.25,-7 v1(-4.25,-6.5) ; -11.5,-8.255 -11.495,-8.25
I2C4_SCL: J2.11 U1.54 | length 11.3
  Component Side w0.2: v1(6.5,2) 6.5,0.75 7.5,-0.25 U1.54 U1.54@11,-0.25
  Solder Side w0.2: v1(6.5,2) 9.75,2 10.29,2.54 J2.11
I2C4_SDA: J2.10 U1.55 | length 10.5
  Component Side w0.2: v1(7.25,3.5) 7.25,0.75 7.75,0.25 U1.55 U1.55@10.75,0.25
  Solder Side w0.2: v1@7.5,3.5 9.5,3.5 9.81,3.81 J2.10
NetC11_1: C11.1 U1.71 | length 2.2
  Component Side w0.2: U1.71 11.5,8.25 11.75,8 11.75,7.75 12,7.5 C11.1
NetC12_1: C12.1 U1.106 | length 4.1
  Component Side w0.2: C12.1 -8.5,13.75 -7.75,13 U1.106
NetC20_2: C20.2 R3.1 Y1.1 | length 2.8
  Component Side w0.2: Y1.1@2.7,-14 C20.2 R3.1@4.25,-12.75
NetD1_2: D1.2 R4.1 | length 1.3
  Component Side w0.2: R4.1@-3.25,-13.75 -3.2,-13.8 D1.2
NRST: C16.2 J2.25 R5.2 S1.2 S1.4 U1.25 | length 22.2
  Component Side w0.2: v1(2.25,-9.5) 3,-9.5 3.25,-9.75 U1.25 ; C16.2 v1(8.75,-15) 9.25,-15 10,-14.25 S1.4@10.75,-14.25 ; S1.4@10.75,-14.2 11.7,-14.2 ; R5.2 11.7,-14.2 ; 11.75,-14.25 11.7,-14.2 ; S1.2@14.75,-14.25 14.7,-14.2 S1.2 11.7,-14.2
  Solder Side w0.2: v1(2.25,-9.5) 6.5,-13.75 7.5,-13.75 v1(8.75,-15) 9,-15.25 J2.25@11.435,-15.25
OSC_IN: C21.2 U1.23 Y1.3 | length 7.3
  Component Side w0.2: C21.2 1.5,-15.25 1.25,-15 0.5,-15 0.25,-14.75 0.25,-13.5 2.25,-11.5 U1.23
OSC_OUT: R3.2 U1.24 | length 2.1
  Component Side w0.2: U1.24 2.75,-12.5 R3.2@3,-12.75
PDR_ON: R2.1 U1.143 | length 3.8
  Component Side w0.2: R2.1 -13.375,-8.375 -13.25,-8.25 U1.143@-10.75,-8.25
SDMMC2_CK: J1.35 U1.122 | length 7.1
  Component Side w0.2: U1.122@-10.75,2.25 U1.122 -9.5,2.25 -9.25,2.5 -9.25,3.25 v1(-8.25,4.25)
  Solder Side w0.2: J1.35 -10.44,3.81 -10,4.25 v1(-8.25,4.25)
SDMMC2_CMD: J1.11 U1.123 | length 5
  Component Side w0.2: v1(-13,1.5) -12.75,1.75 U1.123@-10.75,1.75
  Solder Side w0.2: J1.11 -14.04,2.54 v1(-13,1.5)
SDMMC2_D0: J1.12 U1.124 | length 5.2
  Component Side w0.2: v1(-13.75,1) -13.5,0.75 -12.75,0.75 -12.25,1.25 U1.124 U1.124@-10.5,1.25
  Solder Side w0.2: J1.12 -14.02,1.27 v1(-13.75,1)
SPI1_MISO: J2.14 U1.42 | length 9.7
  Component Side w0.2: v1(7.5,-3.75) 7.5,-4.5 9.25,-6.25 U1.42 U1.42@10.75,-6.25
  Solder Side w0.2: v1(7.5,-3.75) 9.98,-1.27 J2.14
SPI1_MOSI: J1.16 U1.135 | length 4.9
  Component Side w0.2: v1(-13.75,-4.25) U1.135 U1.135@-10.5,-4.25
  Solder Side w0.2: J1.16 -14.19,-3.81 v1(-13.75,-4.25)
SPI1_NSS: J1.37 U1.125 | length 5.2
  Component Side w0.2: U1.125@-10.75,0.75 U1.125 -9.25,0.75 -9,1 v1(-9,1.75)
  Solder Side w0.2: J1.37 -9.48,1.27 v1(-9,1.75)
SPI1_SCK: J1.36 U1.126 | length 8.3
  Component Side w0.2: U1.126@-10.75,0.25 U1.126 -8.75,0.25 -8.25,0.75 v1(-8.25,3)
  Solder Side w0.2: J1.36 -8.71,2.54 v1(-8.25,3)
SPI4_MISO: J2.7 U1.66 | length 8
  Component Side w0.2: v1(7.5,6) 7.75,5.75 U1.66@10.75,5.75
  Solder Side w0.2: v1(7.5,6) 8,6.5 8.75,6.5 9.87,7.62 J2.7
SPI4_MOSI: J2.31 U1.67 | length 12.3
  Component Side w0.2: v1(7.5,7) 8.25,6.25 U1.67 U1.67@11,6.25
  Solder Side w0.2: v1(7.5,7) 8.5,7 9.755,8.255 13.462,8.255 14.097,8.89 J2.31
SPI4_NSS: J1.49 U1.3 | length 6.8
  Component Side w0.2: v1(-10,-14) -8,-14 -7.75,-13.75 U1.3@-7.75,-10.75
  Solder Side w0.2: J1.49 -10.03,-13.97 v1(-10,-14)
SPI4_SCK: J1.23 U1.1 | length 8.5
  Component Side w0.2: v1(-13.75,-12.75) -9.25,-12.75 -8.75,-12.25 U1.1 U1.1@-8.75,-10.5
  Solder Side w0.2: J1.23 -13.8,-12.7 v1(-13.75,-12.75)
SPI6_MISO: J1.13 U1.127 | length 4.6
  Component Side w0.2: v1(-13.75,0) -12.25,0 -12,-0.25 U1.127@-10.75,-0.25
  Solder Side w0.2: J1.13 v1(-13.75,0)
SPI6_MOSI: J1.38 U1.129 | length 4.7
  Component Side w0.2: U1.129@-10.75,-1.25 U1.129 -9.75,-1.25 v1(-9,-0.5)
  Solder Side w0.2: J1.38 -9.5,0 v1(-9,-0.5)
SPI6_NSS: J3.6 U1.93 | length 6.1
  Component Side w0.25: v1(-1.25,8) U1.93
  Solder Side w0.25: v1(-1.25,8) J3.6@-1.25,11.415
SPI6_SCK: J1.14 U1.128 | length 4.7
  Component Side w0.2: v1(-13.75,-0.75) U1.128@-10.75,-0.75
  Solder Side w0.2: J1.14 -14.27,-1.27 v1(-13.75,-0.75)
SYS_JTCK-SWCLK: J1.3 U1.109 | length 8.2
  Component Side w0.2: v1(-13.75,12.75) -12,12.75 -11.75,12.5 -11.75,9 -11.5,8.75 U1.109
  Solder Side w0.2: J1.3 -13.8,12.7 v1(-13.75,12.75)
SYS_JTDO-SWO: J1.40 U1.133 | length 7
  Component Side w0.2: U1.133@-10.75,-3.25 U1.133 -8.5,-3.25 v1(-7.75,-2.5)
  Solder Side w0.2: J1.40 -7.79,-2.54 v1(-7.75,-2.5)
SYS_JTMS-SWDIO: J3.1 U1.105 | length 4.3
  Component Side w0.2: v1(-7.25,9) U1.105
  Solder Side w0.2: J3.1 -7.62,9.37 v1(-7.25,9)
TIM1_CH1: J2.9 U1.60 | length 5
  Component Side w0.2: v1(9.25,4.25) 9.25,3.25 9.75,2.75 U1.60@10.25,2.75
  Solder Side w0.2: v1(9.25,4.25) 9.25,4.75 9.5,5 11.355,5 J2.9
TIM1_CH1N: J2.28 U1.74 | length 8.7
  Component Side w0.2: U1.74 U1.74@8.3,10.775 ; U1.74@8.25,10.75 8.25,11.75 9.5,13 v1(13,13)
  Solder Side w0.2: v1(13,13) 13.5,13 13.8,12.7 J2.28
TIM1_CH2: J2.33 U1.64 | length 5.5
  Component Side w0.2: U1.64 11.75,4.75 12,5 13,5 v1(13.5,5.5)
  Solder Side w0.2: v1(13.5,5.5) 13.5,6 13.85,6.35 J2.33
TIM1_CH2N: J2.34 U1.63 | length 4.9
  Component Side w0.2: U1.63 12,4.25 12.25,4.5 12.5,4.5 v1(13.75,4.5)
  Solder Side w0.2: v1(13.75,4.5) 14.33,5.08 J2.34
TIM1_CH3: J3.2 U1.102 | length 4.4
  Component Side w0.2: v1(-5.75,9) U1.102
  Solder Side w0.2: J3.2 -6.35,9.6 v1(-5.75,9)
TIM1_CH3N: J2.32 U1.65 | length 12.2
  Component Side w0.2: v1(7.5,5) 7.75,5.25 U1.65 U1.65@10.75,5.25
  Solder Side w0.2: v1(7.5,5) 8.5,6 9,6 9.985,6.985 12.446,6.985 13.081,7.62 J2.32
TIM1_CH4: J3.15 U1.103 | length 4.8
  Component Side w0.2: U1.103 -6.25,12 -6,12.25 v1(-6,13)
  Solder Side w0.2: J3.15 -6.35,14.1 -6,13.75 v1(-6,13)
TIM2_CH1: J2.46 U1.34 | length 11.8
  Component Side w0.2: v1(6.75,-8.5) 7.75,-9.5 U1.34
  Solder Side w0.2: v1(6.75,-8.5) 7.5,-9.25 10,-9.25 10.275,-9.525 12.573,-9.525 13.208,-10.16 J2.46
TIM2_CH2: J2.20 U1.35 | length 8.9
  Component Side w0.2: v1(6.75,-7.75) 7,-7.75 7.25,-8 8.25,-9 U1.35 U1.35@8.25,-10.75
  Solder Side w0.2: v1(6.75,-7.75) 7,-7.75 7.25,-8 8.14,-8.89 J2.20
TIM2_CH3: J2.29 U1.69 | length 11.2
  Component Side w0.2: U1.69@10.75,7.25 U1.69 9.25,7.25 9,7.5 9,9.5 9.75,10.25 11.25,11.75 v1(13.75,11.75)
  Solder Side w0.2: v1(13.75,11.75) 14.07,11.43 J2.29
TIM2_CH4: J2.30 U1.70 | length 9.4
  Component Side w0.2: U1.70@10.75,7.75 U1.70 9.75,7.75 9.5,8 9.5,9.25 11.25,11 v1(12.75,11)
  Solder Side w0.2: v1(12.75,11) 13.5,11 14.34,10.16 J2.30
TIM4_CH1: J3.23 U1.81 | length 4.9
  Component Side w0.2: U1.81 v1(4.75,13.75)
  Solder Side w0.2: J3.23 3.81,14.69 v1(4.75,13.75)
TIM4_CH2: J3.11 U1.82 | length 4.5
  Component Side w0.2: v1(4.25,9) U1.82
  Solder Side w0.2: v1(4.25,9) 5.08,9.83 J3.11
TIM4_CH3: J3.10 U1.85 | length 6.6
  Component Side w0.2: v1(2.75,8) U1.85
  Solder Side w0.2: v1(2.75,8) 2.75,9 3.81,10.06 J3.10
TIM4_CH4: J3.22 U1.86 | length 4.6
  Component Side w0.2: U1.86 v1(2.25,13.75)
  Solder Side w0.2: v1(2.25,13.75) 2.54,14.04 J3.22
TIM5_CH3: J2.19 U1.36 | length 5.4
  Component Side w0.2: U1.36@8.75,-10.75 U1.36 v1(8.75,-8.375)
  Solder Side w0.2: v1(8.75,-8.375) 8.75,-8.25 9.38,-7.62 J2.19
TIM5_CH4: J2.45 U1.37 | length 5.1
  Component Side w0.2: U1.37 11.25,-8.75 12,-9.5 v1@13.75,-9.5
  Solder Side w0.2: v1(13.716,-9.398) 14.224,-8.89 J2.45
TIM8_CH1: J3.5 U1.96 | length 6.2
  Component Side w0.2: v1(-2.75,8) U1.96
  Solder Side w0.2: v1(-2.75,8) -2.75,8.75 -2.54,8.96 J3.5
TIM8_CH1N: J2.16 U1.43 | length 5
  Component Side w0.2: v1(9,-5) 9.75,-5.75 U1.43 U1.43@10.75,-5.75
  Solder Side w0.2: v1(9,-5) 10.19,-3.81 J2.16
TIM8_CH2: J3.18 U1.97 | length 4.9
  Component Side w0.2: U1.97 v1(-3.25,13.75)
  Solder Side w0.2: v1@-3.17,13.83 v1(-3.25,13.75) -2.54,14.46 J3.18
TIM8_CH2N: J2.2 U1.75 | length 6.4
  Component Side w0.2: U1.75@7.75,10.5 U1.75 7.75,12 8.75,13 v1(8.75,13.75)
  Solder Side w0.2: v1(8.75,13.75) 9.25,13.75 9.47,13.97 J2.2
TIM8_CH3: J3.4 U1.98 | length 4.2
  Component Side w0.2: v1(-3.75,9) U1.98
  Solder Side w0.2: J3.4 -3.75,11.375 v1(-3.75,9)
TIM8_CH3N: J3.26 U1.76 | length 5
  Component Side w0.2: U1.76@7.25,10.5 U1.76 7.25,12.5 v1(7.75,13)
  Solder Side w0.2: J3.26 7.62,13.63 7.75,13.5 v1(7.75,13)
TIM8_CH4: J3.17 U1.99 | length 4.7
  Component Side w0.2: U1.99 v1(-4.25,13)
  Solder Side w0.2: v1(-4.25,13) -4.25,13.75 -3.81,14.19 J3.17
TIM9_CH1: J1.25 U1.4 | length 12.3
  Component Side w0.2: v1(-13.75,-15.25) -11,-15.25 -10.5,-14.75 -7.5,-14.75 -7.25,-14.5 U1.4 U1.4@-7.25,-10.5
  Solder Side w0.2: J1.25 -13.76,-15.24 v1(-13.75,-15.25)
TIM9_CH2: J1.50 U1.5 | length 9
  Component Side w0.2: v1(-10,-15.25) -7.5,-15.25 -6.75,-14.5 U1.5 U1.5@-6.75,-10.5
  Solder Side w0.2: J1.50 -10.01,-15.24 v1(-10,-15.25)
UART4_DE: J1.4 U1.110 | length 7.5
  Component Side w0.2: v1(-13.75,11.5) -12.5,11.5 -12.25,11.25 -12.25,8.5 -12,8.25 U1.110@-10.75,8.25
  Solder Side w0.2: J1.4 -13.82,11.43 v1(-13.75,11.5)
UART4_RX: J1.6 U1.112 | length 5.7
  Component Side w0.2: v1(-13.75,9) -13.5,9 -13.25,8.75 -13.25,8 -12.5,7.25 U1.112@-10.75,7.25
  Solder Side w0.2: J1.6 -13.86,8.89 v1(-13.75,9)
UART4_TX: J1.5 U1.111 | length 6.6
  Component Side w0.2: v1(-13.75,10.25) -13,10.25 -12.75,10 -12.75,8.25 -12.25,7.75 U1.111@-10.75,7.75
  Solder Side w0.2: J1.5 -13.84,10.16 v1(-13.75,10.25)
UART5_RX: J1.8 U1.116 | length 6
  Component Side w0.2: v1(-13.75,6.75) -13.75,6 -13.5,5.75 -12.75,5.75 -12.25,5.25 U1.116 U1.116@-10.5,5.25
  Solder Side w0.2: J1.8 -14.15,6.35 v1(-13.75,6.75)
UART5_TX: J1.7 U1.113 | length 5.2
  Component Side w0.2: v1(-13.75,7.75) -12.75,6.75 U1.113 U1.113@-10.5,6.75
  Solder Side w0.2: J1.7 -13.88,7.62 v1(-13.75,7.75)
USART1_DE: J3.14 U1.104 | length 4.9
  Component Side w0.2: v1(-7.25,13.5) -6.75,13 U1.104
  Solder Side w0.2: J3.14 -7.62,13.87 v1(-7.25,13.5)
USART1_RX: J1.30 U1.137 | length 21.3
  Component Side w0.2: U1.137@-10.75,-5.25 U1.137 -9.5,-5.25 -8.5,-4.25 -7.25,-4.25 -6.5,-3.5 -6.5,0 -6.75,0.25 v1(-6.75,4.5)
  Solder Side w0.2: J1.30 -10.41,10.16 -6.75,6.5 v1(-6.75,4.5)
USART1_TX: J3.16 U1.101 | length 4.6
  Component Side w0.2: U1.101 v1(-5.25,13.75)
  Solder Side w0.2: v1(-5.25,13.75) -5.08,13.92 J3.16
USART3_RX: J3.13 U1.78 | length 4.7
  Component Side w0.2: v1(6.25,9) U1.78
  Solder Side w0.2: v1(6.25,9) 7.62,10.37 J3.13
USART3_TX: J3.25 U1.77 | length 4.7
  Component Side w0.2: U1.77 v1(6.75,13.75)
  Solder Side w0.2: J3.25 6.35,14.15 v1(6.75,13.75)
VDD: C1.1 C2.2 C3.2 C4.2 C5.2 C6.2 C7.2 C8.2 C9.2 C10.2 C13.2 C14.2 C15.2 C18.2 FB1.1 J1.2 J2.27 R2.2 R5.1 U1.6 U1.17 U1.30 U1.39 U1.52 U1.62 U1.72 U1.84 U1.95 U1.108 U1.121 U1.131 U1.144 | length 51
  Component Side w0.2: R2.2 -14.375,-9.5 v1(-13.5,-9.5) -13.25,-9.5 C10.2 U1.144@-10.75,-8.75 ; v1(-13.25,-2.5) C9.2 -12,-2.5 -11.75,-2.25 U1.131 ; v1(-13.25,2.5) C13.2 -12,2.5 -11.75,2.75 U1.121 ; v1(-13.25,14) -11.25,14 -10.25,13 -10.25,12.5 -10,12.25 C8.2 -9.5,11.75 -9.25,11.5 -9,11.5 -8.75,11.25 U1.108 ; U1.6 C15.2 v1(-5.5,-12.25) ; v1(-2.5,13.25) C14.2 -2.5,12 -2.25,11.75 U1.95 ; v1(-0.75,-13.25) -0.5,-13 C1.1 -0.5,-12 -0.75,-11.75 U1.17 ; v1(3,13.25) C7.2 3,12 3.25,11.75 U1.84 ; U1.30 5.75,-11.75 5.5,-12 C2.2 5.5,-13.25 v1(6.5,-14.25) ; U1.39 11.75,-7.75 12,-7.5 C3.2 v1(13.25,-7.5) ; U1.52 11.75,-1.25 12,-1 C4.2 v1(13.25,-1) ; U1.62 C5.2 v1(13.25,3.75) ; U1.72 C6.2 13,8.75 v1(13.25,9) ; v1(12.75,-11.5) 13.3,-12.05 R5.1 14.325,-12.75 FB1.1
  Solder Side w0.2: J1.2 -13.28,13.97 v1(-13.25,14) ; v1(-3.75,0.75) -3.7,0.8 C18.2 ; v1(-2.5,-0.25) C18.2 ; v1(-1.25,0.75) -1.3,0.8 C18.2 ; v1(13.75,13.97) J2.27
VDDA: C17.2 C19.2 FB1.2 U1.32 U1.33 | length 12.9
  Component Side w0.2: U1.32 6.75,-11.5 7,-11.75 7.25,-11.75 ; U1.33 7.25,-11.75 ; C19.2 FB1.2 10.95,-10.675 9.125,-12.5 C17.2 7.75,-12 7.5,-11.75 7.25,-11.75
pads on no net: J1.22 J1.27 J1.28 J1.29 J1.48 J2.4 J2.5 S1.5

## Polygon pours and split planes (outlines as drawn)
GND on Ground Plane (split plane): 16.49,-17.49 -16.49,-17.49 -16.49,16.49 16.49,16.49
VDD on Power Plane (split plane): 16.49,-17.49 -16.49,-17.49 -16.49,16.49 16.49,16.49

## Dimensions
-17,16 to 17,14 on Component Side
17.5,17 to 19.5,-17 on Component Side